# Altium PCB Upperarm_GPT.PcbDoc
Units mil, origin at the board's own origin, x right, y up, seen from the top; angles counter-clockwise.
Board outline 17000 x 4500 mil, 2 copper layers (Top Layer, Bottom Layer); 9 components, 10 nets, 103 pads, 15 vias.
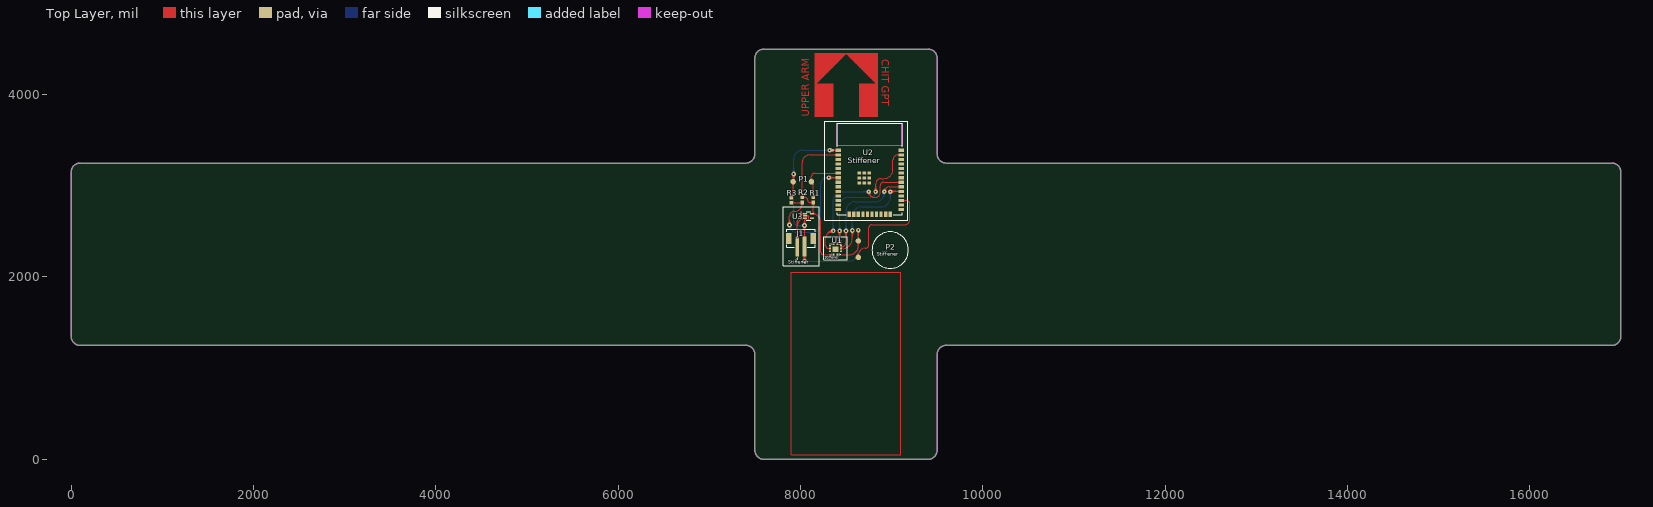
[diagram p0: Top Layer view]
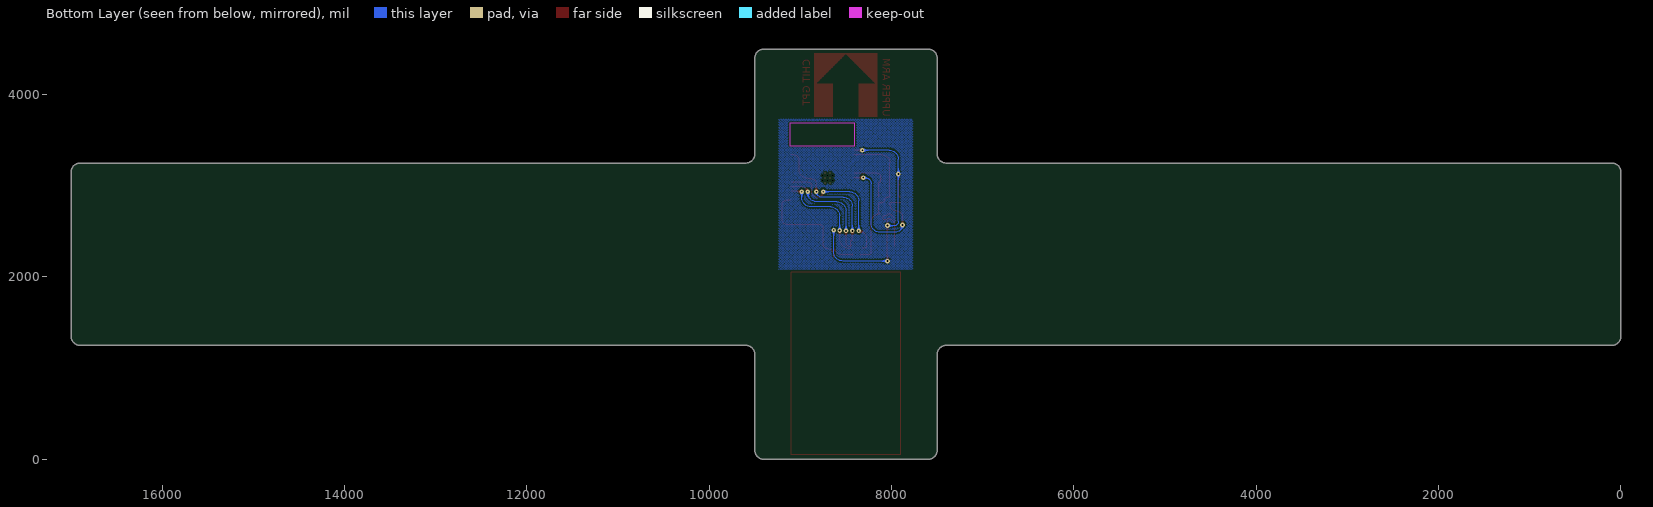
[diagram p1: Bottom Layer view, seen from below]

## Layer stack, top to bottom
Top Solder: solder mask 0.4724, FC-001, Dk 4
Top Solder: solder mask 0.4, Solder Resist, Dk 3.5
Top Layer: signal copper 1.4
Dielectric 1: dielectric 12.6, FR-4, Dk 4.8
Bottom Layer: signal copper 1.4
Flex Bottom Coverlay: solder mask 0.4, Solder Resist, Dk 3.5
Flex Bottom Coverlay: solder mask 0.4724, FC-001, Dk 4

## Board outline
7500,100 7500,1150 ccw(c7400,1150) 7400,1250 100,1250 cw(c100,1350) 0,1350 0,3150 cw(c100,3150) 100,3250 7400,3250 ccw(c7400,3350) 7500,3350 7500,4400 cw(c7600,4400) 7600,4500 9400,4500 cw(c9400,4400) 9500,4400 9500,3350 ccw(c9600,3350) 9600,3250 16900,3250 cw(c16900,3150) 17000,3150 17000,1350 cw(c16900,1350) 16900,1250 9600,1250 ccw(c9600,1150) 9500,1150 9500,100 cw(c9400,100) 9400,0 7600,0 cw(c7600,100)
board region Main: 9250,0 7750,0 7750,4500 9250,4500
board region "Left Strap": 9250,4500 9400,4500 9409.85,4500 9429.17,4496.16 9447.37,4488.62 9463.75,4477.68 9477.68,4463.75 9488.62,4447.37 9496.16,4429.17 9500,4409.85 9500,4400 9500,3350 9500.48,3340.2 9504.31,3320.97 9511.81,3302.86 9522.7,3286.56 9536.56,3272.7 9552.86,3261.81 9570.97,3254.31 9590.2,3250.48 9600,3250 16900,3250 16909.85,3250 16929.17,3246.16 16947.37,3238.62 16963.75,3227.68 16977.68,3213.75 16988.62,3197.37 16996.16,3179.17 17000,3159.85 17000,3150 17000,1350 17000,1340.15 16996.16,1320.83 16988.62,1302.63 16977.68,1286.25 16963.75,1272.32 16947.37,1261.38 16929.17,1253.84 16909.85,1250 16900,1250 9600,1250 9590.2,1249.52 9570.97,1245.69 9552.86,1238.19 9536.56,1227.3 9522.7,1213.44 9511.81,1197.14 9504.31,1179.03 9500.48,1159.8 9500,1150 9500,100 9500,90.15 9496.16,70.83 9488.62,52.63 9477.68,36.25 9463.75,22.32 9447.37,11.38 9429.17,3.84 9409.85,0 9400,0 9250,0
board region "Right Strap": 7750,0 7600,0 7590.15,0 7570.83,3.84 7552.63,11.38 7536.25,22.32 7522.32,36.25 7511.38,52.63 7503.84,70.83 7500,90.15 7500,100 7500,1150 7499.52,1159.8 7495.69,1179.03 7488.19,1197.14 7477.3,1213.44 7463.44,1227.3 7447.14,1238.19 7429.03,1245.69 7409.8,1249.52 7400,1250 100,1250 90.15,1250 70.83,1253.84 52.63,1261.38 36.25,1272.32 22.32,1286.25 11.38,1302.63 3.84,1320.83 0,1340.15 0,1350 0,3150 0,3159.85 3.84,3179.17 11.38,3197.37 22.32,3213.75 36.25,3227.68 52.63,3238.62 70.83,3246.16 90.15,3250 100,3250 7400,3250 7409.8,3250.48 7429.03,3254.31 7447.14,3261.81 7463.44,3272.7 7477.3,3286.56 7488.19,3302.86 7495.69,3320.97 7499.52,3340.2 7500,3350 7500,4400 7500,4409.85 7503.84,4429.17 7511.38,4447.37 7522.32,4463.75 7536.25,4477.68 7552.63,4488.62 7570.83,4496.16 7590.15,4500 7600,4500 7750,4500

## Design rules (kind name [scope] priority, off if disabled: settings)
Clearance [All] p1: gap=5 ignorepadtopadclearanceinfootprint=FALSE
PolygonConnect [All] p1: connectstyle=Relief reliefconductorwidth=10 reliefentries=4 polygonreliefangle="90 Angle" airgapwidth=10
RoutingCorners [All] p1: cornerstyle=Round minsetback=100 maxsetback=100
RoutingTopology [All] p1: topology=Vertical
RoutingVias [All] p1: holewidth=18 width=30 viastyle="Through Hole" minholewidth=18 minwidth=30 maxholewidth=20 maxwidth=50
SolderMaskExpansion [All] p1: expansion=4 istentingtop=FALSE
Width [All] p1: maxlimit=10 minlimit=5 preferedwidth=8 substack1={0EA1E346-DF71-40D0-BE09-5F43E7521303} toplayer_{0ea1e346-df71-40d0-be09-5f43e7521303}_minwidth=10 toplayer_{0ea1e346-df71-40d0-be09-5f43e7521303}_prefwidth=10 bottomlayer_{0ea1e346-df71-40d0-be09-5f43e7521303}_minwidth=10 bottomlayer_{0ea1e346-df71-40d0-be09-5f43e7521303}_prefwidth=10
28 further rules are at their usual default settings.

## Components (designator, comment, footprint, x,y, rotation, side; value= is the part's Value field where it differs from the comment)
J1 "B2B-PH-SM4-TB" JST_B2B-PH-SM4-TB 8005.63,2423.58 r0 top
P1 "Strain Gauge" "Strain Gauge" 8020,3045 r0 top
P2 "Vibe Motor" "Vibe Motor" 8985,2295 r90 top
R1 "RC0603FR-07100RL" RESC1607X60N 8140,2845 r90 top
R2 "RC0603FR-07100RL" RESC1607X60N 8020,2845 r270 top
R3 "RC0603FR-07100RL" RESC1607X60N 7900,2843.94 r90 top
U1 "MPU-6500" QFN40P300X300X95-25N 8385,2305 r270 top
U2 "ESP32-WROOM-32E_(16MB)" XCVR_ESP32-WROOM-32E_(16MB) 8760,3182.13 r0 top
U3 "MIC5365-3.3YC5-TR" SOT65P210X110-5N 8088.19,2670 r0 top

## Footprints (in the part's own frame and the unit in brackets; to place one, negate y for a bottom-side part, rotate by r counter-clockwise, add the part's x,y. Pads: shape width x height; smd on the part's side, far side on the other; paste and mask are expansions set on the pad)
JST_B2B-PH-SM4-TB [mm]
  rect 1x5.5 smd: 1(-1,-2.25) 2(1,-2.25)
  rect 1.6x3 smd: S1(-3.4,0) S2(3.4,0)
  silkscreen extent -3.97,-5.76 3.98,2.5, body extent -3.98,-4.5 3.98,2.5, height 6.75
QFN40P300X300X95-25N [mm]
  rrect25% 0.64x0.22 smd: 1(-1.545,1) 2(-1.545,0.6) 3(-1.545,0.2) 4(-1.545,-0.2) 5(-1.545,-0.6) 6(-1.545,-1) 13(1.545,-1) 14(1.545,-0.6) 15(1.545,-0.2) 16(1.545,0.2) 17(1.545,0.6) 18(1.545,1)
  rrect25% 0.22x0.64 smd: 7(-1,-1.545) 8(-0.6,-1.545) 9(-0.2,-1.545) 10(0.2,-1.545) 11(0.6,-1.545) 12(1,-1.545) 19(1,1.545) 20(0.6,1.545) 21(0.2,1.545) 22(-0.2,1.545) 23(-0.6,1.545) 24(-1,1.545)
  rect 1.54x1.7 smd paste-2: 25(0,0)
  silkscreen extent -2.48,-1.5 1.5,1.5
RESC1607X60N [mm]
  rect 1.04x1.02 smd: 1(-0.735,0) 2(0.735,0)
SOT65P210X110-5N [mm]
  rect 1.17x0.4 smd: 1(-0.97,0.65) 2(-0.97,0) 3(-0.97,-0.65) 4(0.97,-0.65) 5(0.97,0.65)
  silkscreen extent -2.2,-1.17 0.63,1.17
"Strain Gauge" [mil]
  round 60 smd: 1(-100,0) 2(100,0)
"Vibe Motor" [mil]
  round 60 smd: 1(-80,350) 2(100,350)
  silkscreen extent -200,-200 200,200
XCVR_ESP32-WROOM-32E_(16MB) [mm]
  rect 1.5x0.9 smd: 1(-8.75,5.26) 2(-8.75,3.99) 3(-8.75,2.72) 4(-8.75,1.45) 5(-8.75,0.18) 6(-8.75,-1.09) 7(-8.75,-2.36) 8(-8.75,-3.63) 9(-8.75,-4.9) 10(-8.75,-6.17) 11(-8.75,-7.44) 12(-8.75,-8.71) 13(-8.75,-9.98) 14(-8.75,-11.25) 25(8.75,-11.25) 26(8.75,-9.98) 27(8.75,-8.71) 28(8.75,-7.44) 29(8.75,-6.17) 30(8.75,-4.9) 31(8.75,-3.63) 32(8.75,-2.36) 33(8.75,-1.09) 34(8.75,0.18) 35(8.75,1.45) 36(8.75,2.72) 37(8.75,3.99) 38(8.75,5.26)
  rect 0.9x1.5 smd: 15(-5.715,-12.5) 16(-4.445,-12.5) 17(-3.175,-12.5) 18(-1.905,-12.5) 19(-0.635,-12.5) 20(0.635,-12.5) 21(1.905,-12.5) 22(3.175,-12.5) 23(4.445,-12.5) 24(5.715,-12.5)
  rect 0.9x0.9 smd: 39_1(-2.9,-1.06) 39_2(-1.5,-1.06) 39_3(-0.1,-1.06) 39_4(-2.9,-2.46) 39_5(-1.5,-2.46) 39_6(-0.1,-2.46) 39_7(-2.9,-3.86) 39_8(-1.5,-3.86) 39_9(-0.1,-3.86)
  round 0.3 hole 0.2 mask+0: 39_10(-2.2,-1.06) 39_11(-0.8,-1.06) 39_12(-2.9,-1.76) 39_13(-1.5,-1.76) 39_14(-0.1,-1.76) 39_15(-2.2,-2.46) 39_16(-0.8,-2.46) 39_17(-2.9,-3.16) 39_18(-1.5,-3.16) 39_19(-0.1,-3.16) 39_20(-2.2,-3.86) 39_21(-0.8,-3.86)
  Keep-Out Layer region: 9,6.56 -9,6.56 -9,12.75 9,12.75
  silkscreen extent -10.3,-12.75 9,12.75, body extent -9,-12.75 9,12.75, height 3.25

## Part data
J1: "Connector Header Surface Mount 2 position 0.079 (2.00mm)", Package="NON STANDARD-2 JST", Availability="In Stock", Check_prices=https://www.snapeda.com/parts/B2B-PH-SM4-TB/JST/view-part/?ref=eda, MF=JST, MP=B2B-PH-SM4-TB, Price=None, Purchase-URL=https://pricing.snapeda.com/search/part/B2B-PH-SM4-TB/?ref=eda, SnapEDA_Link=https://www.snapeda.com/parts/B2B-PH-SM4-TB/JST/view-part/?ref=snap
R1 R2 R3: "RES SMT 100R 1% 0603 T/R PICK#92931", Package=None, Availability=Unavailable, MP=RC0603FR-07100RL, Price=None
U1: "Accelerometer, Gyroscope, 6 Axis Sensor IÂ²C, SPI Output", Package="QFN-24 TDK", Availability=Warning, DigiKey-Purchase-URL=https://snapeda.com/shop?store=DigiKey&id=48597, MF="TDK InvenSense", Mouser-Purchase-URL=https://snapeda.com/shop?store=Mouser&id=48597, MP=MPU-6500, Price=None, SnapEDA_Link=https://www.snapeda.com/parts/MPU-6500/TDK%20InvenSense/view-part/48597/?ref=snap
U2: "Bluetooth, WiFi 802.11b/g/n, Bluetooth v4.2 +EDR, Class 1, 2 and 3 Transceiver Module 2.4GHz ~ 2.5GHz Integrated, Trace Surface Mount", Package=None, Availability="Not in stock", Check_prices=https://www.snapeda.com/parts/ESP32-WROOM-32E%20(16MB)/Espressif+Systems/view-part/?ref=eda, MF="Espressif Systems", MP="ESP32-WROOM-32E (16MB)", Price=None, SnapEDA_Link=https://www.snapeda.com/parts/ESP32-WROOM-32E%20(16MB)/Espressif+Systems/view-part/?ref=snap
U3: "Linear Voltage Regulator IC 1 Output 150mA SC-70-5", Package=None, Availability=Unavailable, MP=MIC5365-3.3YC5-TR, Price=None

## Via types
v1: diameter 50, hole 20, Top Layer to Bottom Layer, 15 vias

## Nets (pads, with @x,y where several pads share a name; then routed paths per layer and width w, separated by ;. In a path a pad name is that pad's centre, name@x,y a point inside that pad or via, vN(x,y) a via of type N, cw(c..) or ccw(c..) an arc to the next point about the centre after c; other vN are vias at no path point)
3.3V: R1.1 R2.1 U1.13 U2.2 U3.5 | length 1723.2
  Top Layer w10: U1.13 8250.83,2244.17 cw(c8250.83,2270) 8225,2270 8225,2596.97 ccw(c8126.38,2596.97) U3.5 ccw(c8126.38,2709.21) 8140,2709.21 R1.1 8103.94,2816.06 cw(c8103.94,2840) 8080,2840 ccw(c8046.06,2840) 8046.06,2873.94 R2.1 8020,3255 cw(c8104.21,3255) 8104.21,3339.21 U2.2
ADO/SDO: U1.9 U2.31 | length 1567.8
  Top Layer w10: U1.9 8307.13,2312.87 cw(c8307.13,2345) 8275,2345 8275,2420 cw(c8360,2420) v1(8360,2505) ; v1(8750,2935) ccw(c8810,2935) 8810,2875 8825,2875 ccw(c8825,2925) 8875,2925 8875,3000 cw(c8914.21,3000) 8914.21,3039.21 U2.31
  Bottom Layer w10: v1(8360,2505) 8360,2835 cw(c8460,2835) 8460,2935 v1(8750,2935)
GND: J1.2 P1.1 P2.2 R3.2 U1.18 U2.1 U3.2 | length 3548
  Top Layer w10: R3.2 ccw(c7900,2892.87) 7920,2892.87 P1.1 ccw(c7920,3050) 7925,3050 v1(7925,3130) ; v1(8045,2175) J1.2 v1(8045,2565) 8045,2620 cw(c8054.38,2616.54) 8054.38,2626.54 8084.14,2626.54 8090,2632.39 8090,2664.14 8084.14,2670 U3.2 ; v1(8320,3390) 8414.72,3390 cw(c8414.72,3389.21) U2.1 ; U1.18 8535,2244.17 ccw(c8535,2344.17) 8635,2344.17 P2.2 v1(8635,2515)
  Bottom Layer w10: v1(8045,2175) 8535,2175 ccw(c8535,2275) 8635,2275 v1(8635,2515) ; v1(8045,2565) 8045,2560 7975,2560 cw(c7975,2610) 7925,2610 7925,3290 cw(c8025,3290) 8025,3390 v1(8320,3390)
NetJ1_1: J1.1 U3.1 U3.3 | length 530.5
  Top Layer w10: J1.1 7966.26,2560.67 cw(c8050,2560.67) 7966.76,2569.81 ; U3.3 ccw(c8050,2560.67) 7966.76,2569.81 ; U3.1 ccw(c8050,2612.35) 7966.76,2612.35 7966.76,2569.81
NetP1_2: P1.2 R1.2 U2.6 | length 555.4
  Top Layer w10: R1.2 8140,3025 ccw(c8120,3025) P1.2 8120,3100 cw(c8159.21,3100) 8159.21,3139.21 U2.6
NetR2_2: R2.2 R3.1 U2.7 | length 1557.4
  Top Layer w10: v1(7880,2570) 7880,2665 cw(c7935,2665) 7935,2720 ccw(c7935,2805) 8020,2805 R2.2 cw(c8018.94,2816.06) 8018.94,2815 R3.1 ; v1(8310,3090) 8414.72,3090 cw(c8414.72,3089.21) U2.7
  Bottom Layer w10: v1(7880,2570) ccw(c7960,2570) 7960,2490 8125,2490 ccw(c8125,2590) 8225,2590 8225,3025 cw(c8290,3025) 8290,3090 v1(8310,3090)
NetU1_22: U1.22 U2.29 | length 1151.4
  Top Layer w10: U1.22 8467.81,2311.87 8468.04,2311.86 ccw(c8468.04,2402.71) 8529.28,2335.6 ccw(c8445.08,2427.87) 8570,2427.87 v1(8570,2510) ; v1(8985,2935) cw(c8989.21,2935) 8989.21,2939.21 U2.29
  Bottom Layer w10: v1(8570,2510) 8570,2670 cw(c8670,2670) 8670,2770 8885,2770 ccw(c8885,2870) 8985,2870 v1(8985,2935)
NetU1_23: U1.23 U2.30 | length 1186.9
  Top Layer w10: U1.23 ccw(c8445.83,2382.8) 8455.94,2329.57 8459.41,2330.23 ccw(c8457.34,2341.12) 8461.16,2330.72 8464.47,2331.93 ccw(c8445.83,2382.8) 8500,2382.8 v1(8500,2505) ; v1(8920,2935) cw(c8974.21,2935) 8974.21,2989.21 U2.30
  Bottom Layer w10: v1(8500,2505) 8500,2725 cw(c8600,2725) 8600,2825 8820,2825 ccw(c8820,2925) 8920,2925 v1(8920,2935)
NetU1_24: U1.24 U2.37 | length 1517.8
  Top Layer w10: v1(8430,2505) 8430,2410 ccw(c8435,2410) 8435,2405 cw(c8435,2394.17) 8445.83,2394.17 U1.24 ; v1(8825,2935) 8825,3020 cw(c8885,3020) 8885,3080 8915,3080 ccw(c8915,3180) 9015,3180 9015,3285 cw(c9069.21,3285) 9069.21,3339.21 U2.37
  Bottom Layer w10: v1(8430,2505) 8430,2775 cw(c8530,2775) 8530,2875 8765,2875 ccw(c8765,2935) v1(8825,2935)
VIB: P2.1 U2.27 | length 1179.9
  Top Layer w10: P2.1 8635,2240 cw(c8710,2240) 8710,2315 ccw(c8710,2355) 8750,2355 8750,2540 cw(c8785,2540) 8785,2575 9145,2575 ccw(c9145,2630) 9200,2630 9200,2800 ccw(c9160.79,2800) 9160.79,2839.21 U2.27
pads on no net: J1.S1 J1.S2 U1.1 U1.2 U1.3 U1.4 U1.5 U1.6 U1.7 U1.8 U1.10 U1.11 U1.12 U1.14 U1.15 U1.16 U1.17 U1.19 U1.20 U1.21 U1.25 U2.3 U2.4 U2.5 U2.8 U2.9 U2.10 U2.11 U2.12 U2.13 U2.14 U2.15 U2.16 U2.17 U2.18 U2.19 U2.20 U2.21 U2.22 U2.23 U2.24 U2.25 U2.26 U2.28 U2.32 U2.33 U2.34 U2.35 U2.36 U2.38 U2.39_1 U2.39_2 U2.39_3 U2.39_4 U2.39_5 U2.39_6 U2.39_7 U2.39_8 U2.39_9 U2.39_10 U2.39_11 U2.39_12 U2.39_13 U2.39_14 U2.39_15 U2.39_16 U2.39_17 U2.39_18 U2.39_19 U2.39_20 U2.39_21 U3.4
copper on no net: | length 6400
  Top Layer w10: 7900,50 9100,50 9100,2050 7900,2050 7900,50

## Polygon pours and split planes (outlines as drawn)
GND on Bottom Layer "GND_L02_P006" (hatched 45Degree grid 20 track 8, pour order 6): 7770,2080 7770,3730 9235,3730 9235,2080
no net on Layer0 "Default Coverlay 2 Top" (split plane): 9250,0 7750,0 7750,4500 9250,4500
no net on Layer0 "Default Coverlay 2 Bottom" (split plane): 9250,0 7750,0 7750,4500 9250,4500

## Keep-outs
Top Layer:
  the board outline again, w10

## Other copper
Top Layer:
  region: 305 vertices and 0 holes, not listed, extent 8154.74,3759.48 8849.74,4454.48
  text "CHIT GPT" at 8890,4390 h80 r270
  text "UPPER ARM" at 8095,3755 h80 r90

## Silkscreen, mask and mechanical layers (free items; w line width, h text height)
Top Overlay:
  lines w10: 7810,2125 8205,2125 8205,2770 7810,2770 7810,2125 ; 8255,2190 8515,2190 8515,2440 8255,2440 8255,2190 ; 8265,2620 9180,2620 9180,3710 8265,3710 8265,2620
  text "Stiffener" at 8520,3245 h60
  text "Stiffener" at 8835,2235 h40
  text "Stiffener" at 8265,2200 h30
  text "Stiffener" at 7865,2145 h35

## Text inside footprints (layer, text, board x,y; h text height)
U2: Mechanical 13 "ANTENNA" at 8523.78,3536.46 h70